# Altium PCB PCB_LED4Pin.PcbDoc
Units mil, origin at the board's own origin, x right, y up, seen from the top; angles counter-clockwise.
Board outline 3590 x 1670 mil, 2 copper layers (Top Layer, Bottom Layer); 12 components, 13 nets, 31 pads, 0 vias.
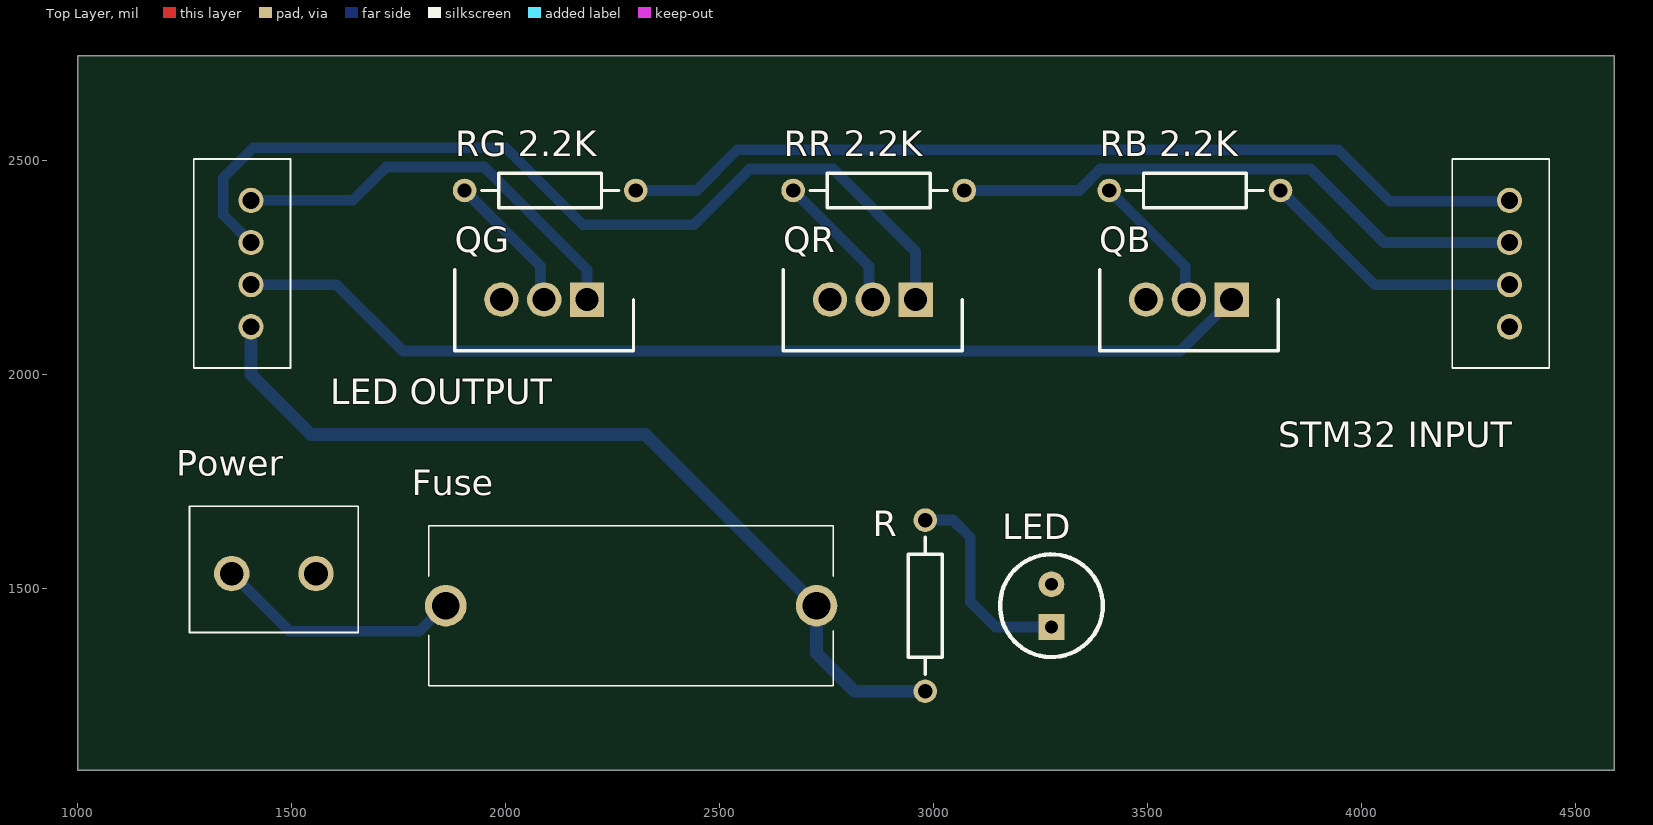
[diagram p0: Top Layer view]
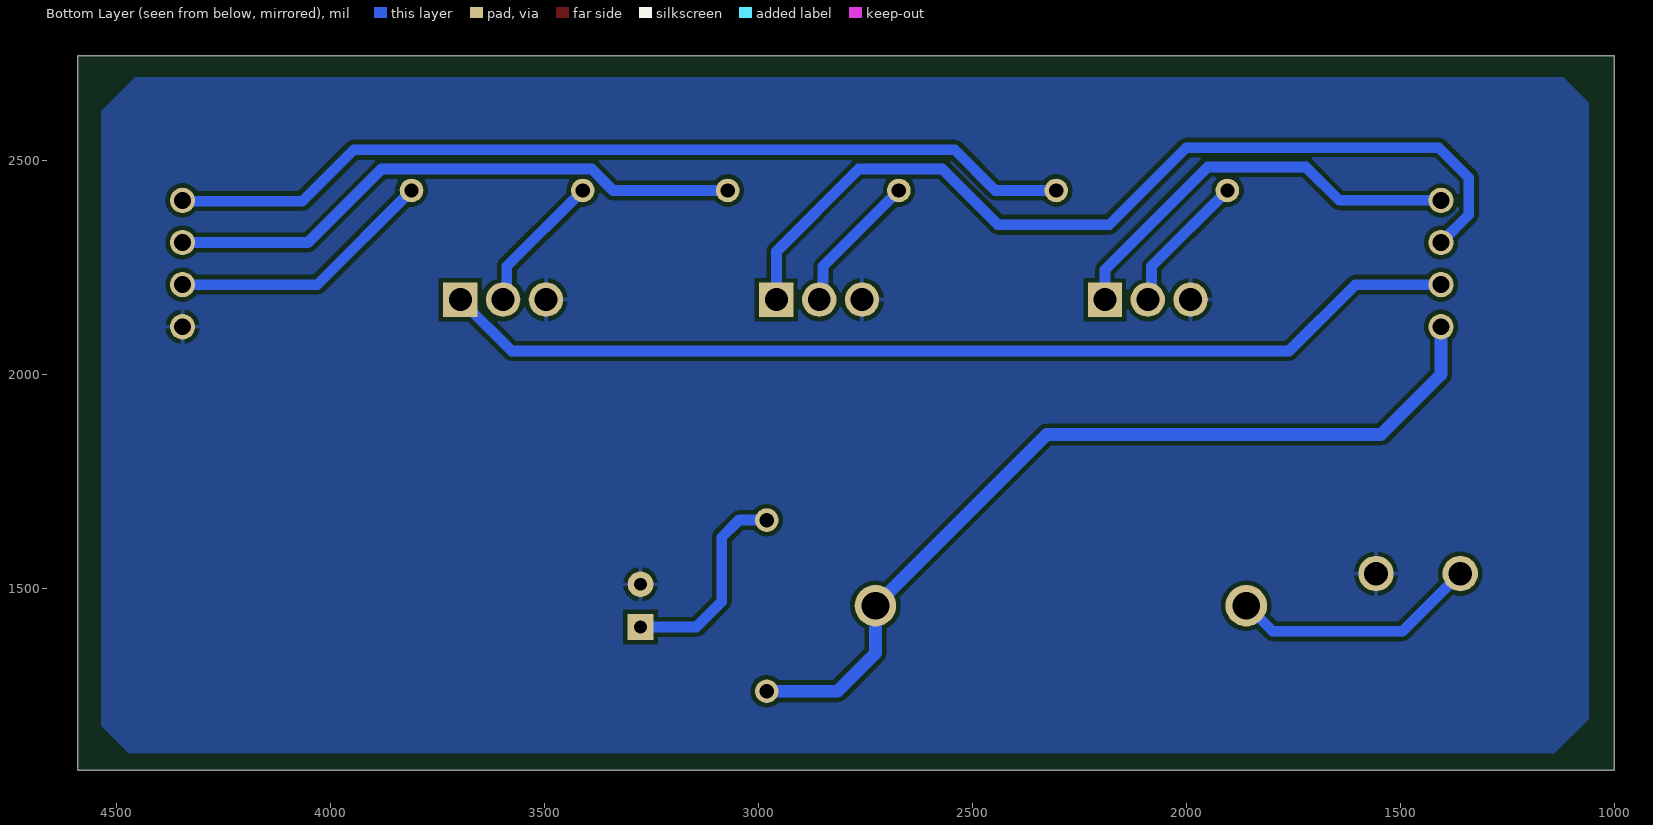
[diagram p1: Bottom Layer view, seen from below]
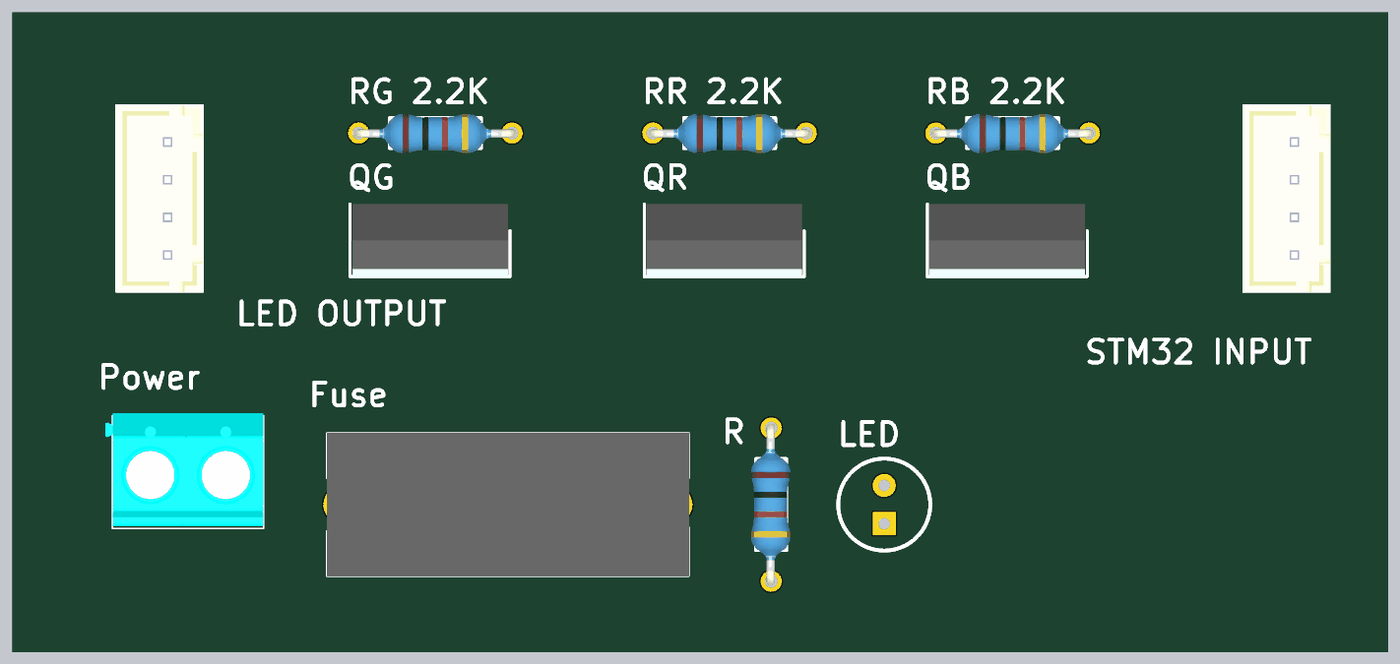
[diagram p2: 3D render of the assembled board from above, using the file's embedded part models]

## Layer stack, top to bottom
Top Solder: solder mask 0.4, Solder Resist, Dk 3.5
Top Layer: signal copper 1.4
Dielectric 1: dielectric 12.6, FR-4, Dk 4.8
Bottom Layer: signal copper 1.4
Bottom Solder: solder mask 0.4, Solder Resist, Dk 3.5

## Board outline
1000,1075 4590,1075 4590,2745 1000,2745

## Design rules (kind name [scope] priority, off if disabled: settings)
Clearance [All] p1: gap=10 ignorepadtopadclearanceinfootprint=FALSE except(0: Arc-Hole Track-Hole SMDPad-Hole THPad-Hole Via-Hole Fill-Hole Poly-Hole Region-Hole Text-Hole)
PolygonConnect [All] p1: connectstyle=Relief reliefconductorwidth=10 reliefentries=4 polygonreliefangle="90 Angle" airgapwidth=10
RoutingVias [All] p1: holewidth=28 width=50 viastyle="Through Hole" minholewidth=28 minwidth=50 maxholewidth=28 maxwidth=50
SolderMaskExpansion [All] p1: expansion=4 istentingtop=FALSE
Width 12V [InNet('12V')] p1: maxlimit=30 minlimit=20 preferedwidth=25 minimp=50.000000 maximp=50.000000 favimp=50.000000
Width GND [InNet('GND')] p2: maxlimit=30 minlimit=20 preferedwidth=25 minimp=50.000000 maximp=50.000000 favimp=50.000000
Width [All] p3: maxlimit=25 minlimit=15 preferedwidth=20 minimp=50.000000 maximp=50.000000 favimp=50.000000
30 further rules are at their usual default settings.

## Components (designator, comment, footprint, x,y, rotation, side; value= is the part's Value field where it differs from the comment)
Fuse "C3131" C3131 2726.14,1459.93 r180 top
LED "LED 5mm" "LED 5mm" 3275,1460 r90 top
"LED OUTPUT" "B4B-XH-A_LF__SN_" B4BXHALFSN 1405,2111.57 r90 top
Power "KF301-2P" KF3012P 1360,1535 r0 top
QB "TIP41C" TO254P482X1030X2322-3P 3696.04,2175 r180 top
QG "TIP41C" TO254P482X1030X2322-3P 2190,2175 r180 top
QR "TIP41C" TO254P482X1030X2322-3P 2957.5,2175 r180 top
R "Resistor 0.25W" "Resistor 0.25W" 2980,1459.93 r90 top
"RB 2.2K" "Resistor 2,2K 0.25W" "Resistor 0.25W" 3610,2430 r180 top
"RG 2.2K" "Resistor 2,2K 0.25W" "Resistor 0.25W" 2103.96,2430 r180 top
"RR 2.2K" "Resistor 2,2K 0.25W" "Resistor 0.25W" 2871.46,2430 r180 top
"STM32 INPUT" "B4B-XH-A_LF__SN_" B4BXHALFSN 4345,2111.57 r90 top

## Footprints (in the part's own frame and the unit in brackets; to place one, negate y for a bottom-side part, rotate by r counter-clockwise, add the part's x,y. Pads: shape width x height; smd on the part's side, far side on the other; paste and mask are expansions set on the pad)
B4BXHALFSN [mm]
  round 1.5 hole 1: 1(0,0) 2(2.5,0) 3(5,0) 4(7.5,0)
  silkscreen extent -2.45,-2.35 9.95,3.4, body extent -2.45,-2.35 9.95,3.4, height 7.52
C3131 [mm]
  round 2.46 hole 1.64: 1(0,0) 2(22,0)
  silkscreen extent -1,-4.75 23,4.75, body extent -1,-4.75 23,4.75, height 10.6
KF3012P [mm]
  round 2.1 hole 1.4: 1(0,0) 2(5,0)
  silkscreen extent -2.5,-3.5 7.5,4, body extent -2.99,-3.35 7.51,4.15, height 10
"LED 5mm" [mil]
  rect 60x60 hole 30: 1(-50,0)
  round 60 hole 30: 2(50,0)
  silkscreen extent -120,-120 120,120, body extent -117,-118 96,118, height 268
"Resistor 0.25W" [mm]
  round 1.4 hole 0.85: 1(-5.08,0) 2(5.08,0)
  silkscreen extent -4.06,-1.02 4.06,1.02, body extent -5.35,-1.27 5.35,1.33, height 2.7
TO254P482X1030X2322-3P [mm]
  rect 2.04x2.04 hole 1.36: 1(0,0)
  round 2.04 hole 1.36: 2(2.54,0) 3(5.08,0)
  silkscreen extent -2.76,-1.78 7.84,3.05, body extent -2.61,-1.78 7.69,3.05, height 21.4

## Part data
Fuse: "Undefined or Miscellaneous", Manufacturer_Name="Xucheng Elec", Datasheet Link=https://datasheet.lcsc.com/szlcsc/XC-Elec-Shenzhen-5x20-BLX-Fuse-holder_C3131.pdf, Height=10.5mm, Manufacturer_Part_Number=C3131
"LED OUTPUT" "STM32 INPUT": "Connector", Arrow Part Number=B4B-XH-A(LF)(SN), Manufacturer_Name="JST (JAPAN SOLDERLESS TERMINALS)", Arrow Price/Stock=https://www.arrow.com/en/products/b4b-xh-a-lf-sn/jst-manufacturing, Datasheet Link=https://datasheet.lcsc.com/szlcsc/JST-Sales-America-B4B-XH-A-LF-SN_C144395.pdf, Height=7mm, Manufacturer_Part_Number=B4B-XH-A(LF)(SN)
Power: "Connector", Manufacturer_Name="Handson Technology", Datasheet Link=http://www.handsontec.com/dataspecs/terminal%20block-5mm.pdf, Height=10mm, Manufacturer_Part_Number=KF301-2P
QB QG QR: "Transistor BJT NPN", Manufacturer_Name="Central Semiconductor", Mouser Part Number=610-TIP41C, Datasheet Link=https://www.mouser.com/datasheet/2/68/tip41-1149816.pdf, Height=4.82mm, Manufacturer_Part_Number=TIP41C, Mouser Price/Stock=https://www.mouser.com/Search/Refine.aspx?Keyword=610-TIP41C
"RB 2.2K" "RG 2.2K" "RR 2.2K": library part "Resistor 0.25W"

## Nets (pads, with @x,y where several pads share a name; then routed paths per layer and width w, separated by ;. In a path a pad name is that pad's centre, name@x,y a point inside that pad or via, vN(x,y) a via of type N, cw(c..) or ccw(c..) an arc to the next point about the centre after c; other vN are vias at no path point)
12V: "LED OUTPUT.1" Fuse.1 R.1 | length 2058.2
  Bottom Layer w30: 1405,2111.57 1405,2000 1545,1860 2326.08,1860 Fuse.1 2726.14,1348.86 2815,1260 2979.93,1260 R.1
BLUE_IN: "RB 2.2K.1" "STM32 INPUT.2" | length 626.1
  Bottom Layer w25: 3810,2430 4030,2210 4345,2210
BLUE_OUT: "LED OUTPUT.2" QB.1 | length 2404.9
  Bottom Layer w25: 1405,2210 1605,2210 1760,2055 3576.04,2055 QB.1
Fuse: Fuse.2 Power.1 | length 580.7
  Bottom Layer w25: Power.1 1495,1400 1798.42,1400 1858.35,1459.93 Fuse.2
GND: "STM32 INPUT.1" LED.2 Power.2 QB.3 QG.3 QR.3
GREEN_IN: "RG 2.2K.1" "STM32 INPUT.4" | length 2130.9
  Bottom Layer w25: 2303.96,2430 2446.05,2430 2541.05,2525 3945,2525 4065,2405 4343.15,2405 4345,2406.85
GREEN_OUT: "LED OUTPUT.4" QG.1 | length 986.8
  Bottom Layer w25: 1405,2406.85 1643.03,2406.85 1721.18,2485 1950,2485 2190,2245 QG.1
NetLED_1: LED.1 R.2 | length 486.4
  Bottom Layer w25: R.2 3045.07,1659.93 3085,1620 3085,1470 3145,1410 LED.1
NetQB_2: "RB 2.2K.2" QB.2 | length 332.1
  Bottom Layer w25: 3410,2430 3587.34,2252.66 3587.34,2183.7 QB.2
NetQG_2: "RG 2.2K.2" QG.2 | length 332.1
  Bottom Layer w25: 1903.96,2430 2081.3,2252.66 2081.3,2183.7 QG.2
NetQR_2: "RR 2.2K.2" QR.2 | length 332.1
  Bottom Layer w25: 2671.46,2430 2848.8,2252.66 2848.8,2183.7 QR.2
RED_IN: "RR 2.2K.1" "STM32 INPUT.3" | length 1365.4
  Bottom Layer w25: 3071.46,2430 3339.21,2430 3389.26,2480.06 3879.94,2480.06 4051.58,2308.42 4345,2308.42
RED_OUT: "LED OUTPUT.3" QR.1 | length 2145.7
  Bottom Layer w25: 1405,2308.42 1340,2373.42 1340,2460 1410,2530 2000,2530 2180,2350 2440,2350 2570.06,2480.06 2764.94,2480.06 2957.5,2287.5 QR.1

## Polygon pours and split planes (outlines as drawn)
GND on Bottom Layer "GND_L02_P000" (solid, pour order 0): 1060,2635 1120,2695 4455,2695 4535,2615 4535,1180 4470,1115 1140,1115 1060,1195